# EAGLE board Heart Rate Monitoring System (EAGLE 6.3)
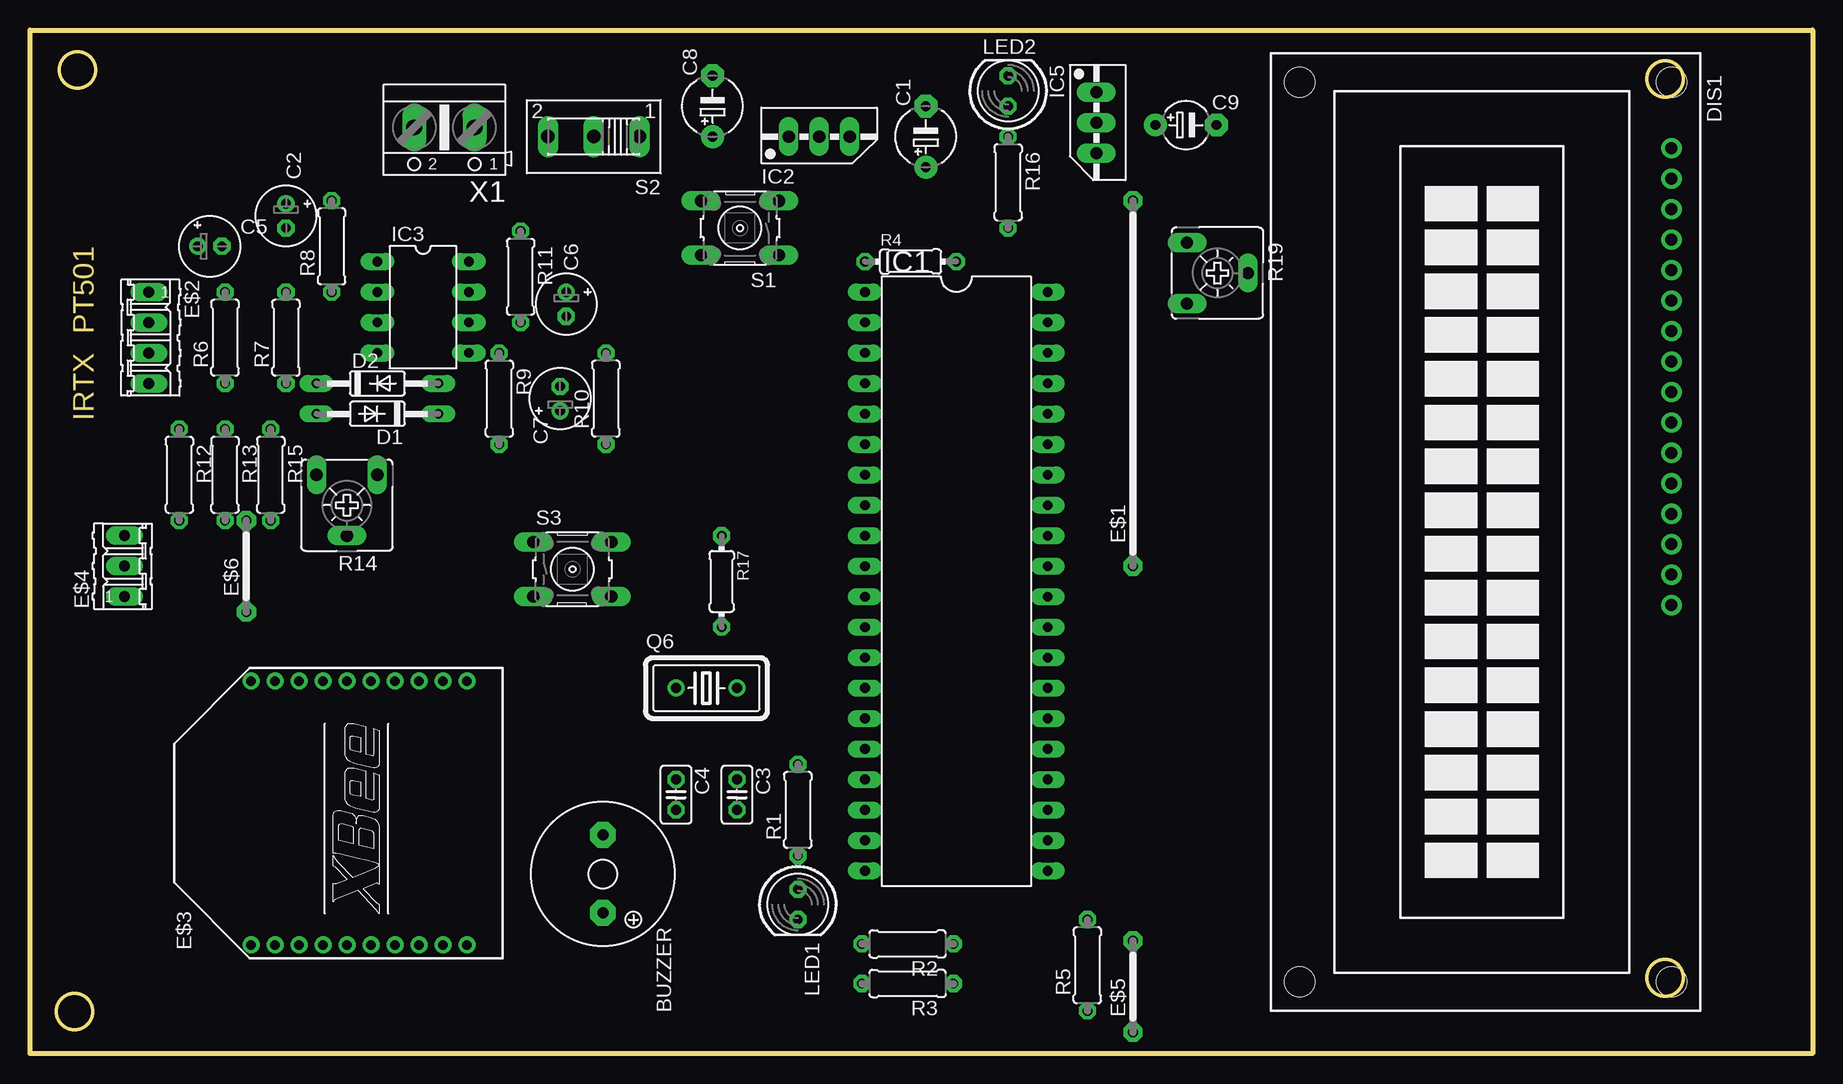
[diagram p0: board, top side]
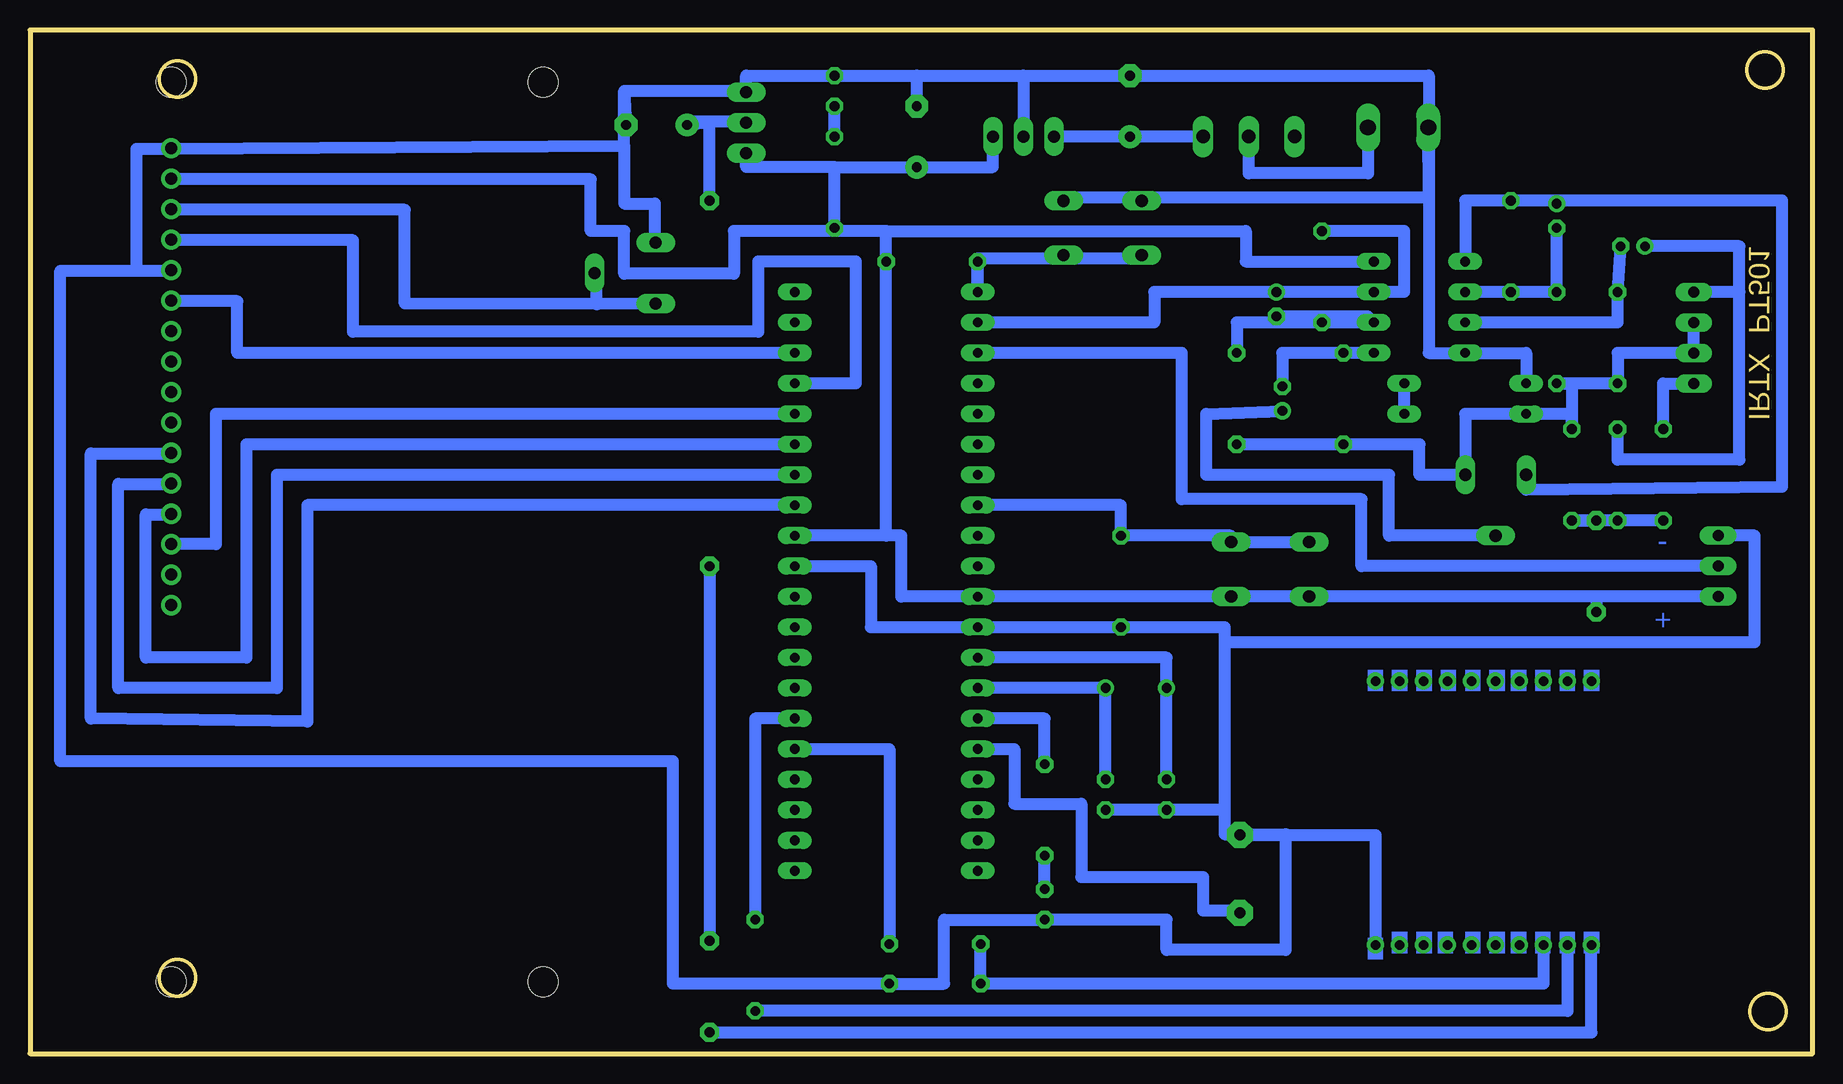
[diagram p1: board, bottom side, seen from below]

Size 148.59 x 85.34 mm. Coordinates in mm from the lower left corner, seen from the top.
Outline: 0,85.34 148.59,85.34 148.59,0 0,0 0,85.34
Outline: circle at 3.97,82.01 radius 1.5
Outline: circle at 3.71,3.52 radius 1.5
Outline: circle at 136.3,6.32 radius 1.5
Outline: circle at 136.3,81.25 radius 1.5
Copper layers (1*16): Top 0.035mm / dielectric 1.5mm / Bottom 0.035mm
Design rules "DFRobot_Eagle_Rule_v0.4": minimum track width 6mil, minimum drill 12mil, track to track 6mil, track to pad 6mil, pad to pad 6mil, via to via 6mil, smd to smd 0mil, copper to edge 10mil, drill to drill 10mil, minimum pad ring 12mil, minimum via ring 8mil, stop-mask expansion 2mil, vias tented up to drill 25mil, thermal gap 10mil

## Footprints (pad centres in the part's own frame; a part is rotated, then mirrored left to right if it is on the bottom)
F/QMBIII = drill 0.914 pad 2.159 octagon: + 3.251,0; - -3.251,0
E5-5 = drill 0.813 pad 1.905: + -2.54,0 | drill 0.813 pad 1.905 octagon: - 2.54,0
E2-5 = drill 0.813 pad 1.27: + -1.016,0 | drill 0.813 pad 1.27 octagon: - 1.016,0
C025-025X050 = drill 0.813 octagon: 1 -1.27,0; 2 1.27,0
E5-4 = drill 0.813 pad 1.905: + -2.54,0 | drill 0.813 pad 1.905 octagon: - 2.54,0
DO35-10 = drill 0.813 long: A 5.08,0; C -5.08,0
TUXGR_16X2_R2 = drill 1 pad 1.676: 1 -32,15.5; 2 -29.46,15.5; 3 -26.92,15.5; 4 -24.38,15.5; 5 -21.84,15.5; 6 -19.3,15.5; 7 -16.76,15.5; 8 -14.22,15.5; 9 -11.68,15.5; 10 -9.14,15.5; 11 -6.6,15.5; 12 -4.06,15.5; 13 -1.52,15.5; 14 1.02,15.5; 15 3.56,15.5; 16 6.1,15.5 | hole 2.5: -37.5,-15.5; 37.5,-15.5; -37.5,15.5; 37.5,15.5
30 = drill 0.813 pad 1.6 octagon: 1 -15.24,0; 2 15.24,0
04P = drill 0.914 long: 1 -3.81,0; 2 -1.27,0; 3 1.27,0; 4 3.81,0
XBEE = drill 0.8 pad 1.27: 1 -11,9; 2 -11,7; 3 -11,5; 4 -11,3; 5 -11,1; 6 -11,-1; 7 -11,-3; 8 -11,-5; 9 -11,-7; 10 -11,-9; 11 11,-9; 12 11,-7; 13 11,-5; 14 11,-3; 15 11,-1; 16 11,1; 17 11,3; 18 11,5; 19 11,7; 20 11,9
03P = drill 0.914 long: 1 -2.54,0; 2 0,0; 3 2.54,0
07 = drill 0.813 pad 1.6 octagon: 1 -3.81,0; 2 3.81,0
DIL40 = drill 0.813 long: 1 -24.13,-7.62; 2 -21.59,-7.62; 3 -19.05,-7.62; 4 -16.51,-7.62; 5 -13.97,-7.62; 6 -11.43,-7.62; 7 -8.89,-7.62; 8 -6.35,-7.62; 9 -3.81,-7.62; 10 -1.27,-7.62; 11 1.27,-7.62; 12 3.81,-7.62; 13 6.35,-7.62; 14 8.89,-7.62; 15 11.43,-7.62; 16 13.97,-7.62; 17 16.51,-7.62; 18 19.05,-7.62; 19 21.59,-7.62; 20 24.13,-7.62; 21 24.13,7.62; 22 21.59,7.62; 23 19.05,7.62; 24 16.51,7.62; 25 13.97,7.62; 26 11.43,7.62; 27 8.89,7.62; 28 6.35,7.62; 29 3.81,7.62; 30 1.27,7.62; 31 -1.27,7.62; 32 -3.81,7.62; 33 -6.35,7.62; 34 -8.89,7.62; 35 -11.43,7.62; 36 -13.97,7.62; 37 -16.51,7.62; 38 -19.05,7.62; 39 -21.59,7.62; 40 -24.13,7.62
78MXXS = drill 1.016 long: GND 0,-2.54; IN -2.54,-2.54; OUT 2.54,-2.54
DIL08 = drill 0.813 long: 1 -3.81,-3.81; 2 -1.27,-3.81; 3 1.27,-3.81; 4 3.81,-3.81; 5 3.81,3.81; 6 1.27,3.81; 7 -1.27,3.81; 8 -3.81,3.81
LED5MM = drill 0.813 octagon: A -1.27,0; K 1.27,0
HC18U-V = drill 0.813: 1 -2.54,0; 2 2.54,0
0207/7 = drill 0.813 octagon: 1 -3.81,0; 2 3.81,0
0204/7 = drill 0.813 octagon: 1 -3.81,0; 2 3.81,0
CA6V = drill 1.016 long: A -2.54,-2.54; E 2.54,-2.54; S 0,2.54
B3F-10XX = drill 1.016 long: 1 -3.251,2.261; 2 3.251,2.261; 3 -3.251,-2.261; 4 3.251,-2.261
255SB = drill 1.118 long: 1 -3.81,0; 2 0,0; 3 3.81,0
AK500/2 = drill 1.321 long: 1 -2.515,0; 2 2.515,0

## Placement (x,y rotation side)
BUZZER  [F/QMBIII]  47.75,14.99 270 top
C1  220uF  [E5-5]  74.68,76.45 90 top
C2  0.47uF  [E2-5]  21.34,69.85 270 top
C3  22p  [C025-025X050]  58.93,21.59 270 top
C4  22p  [C025-025X050]  53.85,21.59 270 top
C5  10uF  [E2-5]  14.99,67.31 0 top
C6  0.47uF  [E2-5]  44.7,62.48 270 top
C7  10uF  [E2-5]  44.2,54.61 90 top
C8  220uF  [E5-5]  56.9,78.99 90 top
C9  220uF  [E5-4]  96.36,77.42 0 top
D1  1N4148  [DO35-10]  28.96,53.34 180 top
D2  1N4148  [DO35-10]  28.96,55.88 0 top
DIS1  TUXGR_16X2_R2  [TUXGR_16X2_R2]  121.33,43.49 270 top
E$1  [30]  91.95,55.88 90 top
E$2  [04P]  9.91,59.69 270 top
E$3  BLUEBEE  [XBEE]  27.43,20.07 90 top
E$4  LM35DZ  [03P]  7.87,40.64 90 top
E$5  [07]  91.95,5.59 90 top
E$6  [07]  18.03,40.64 90 top
IC1  PIC16F877P  [DIL40]  77.22,39.37 270 top
IC2  LM7805  [78MXXS]  65.79,78.99 0 top
IC3  LM358N  [DIL08]  32.77,62.23 270 top
IC5  LM1117  [78MXXS]  91.43,77.61 270 top
LED1  [LED5MM]  64.01,12.45 270 top
LED2  [LED5MM]  81.53,80.26 90 top
Q6  4MHz  [HC18U-V]  56.39,30.48 0 top
R1  1K  [0207/7]  64.01,20.32 90 top
R2  1.8K  [0207/7]  73.15,9.14 180 top
R3  3.3K  [0207/7]  73.15,5.84 180 top
R4  1.5K  [0204/7]  73.41,66.04 0 top
R5  1.8K  [0207/7]  88.14,7.37 90 top
R6  20K  [0207/7]  16.26,59.69 90 top
R7  1K  [0207/7]  21.34,59.69 90 top
R8  100K  [0207/7]  25.15,67.31 90 top
R9  20K  [0207/7]  39.12,54.61 270 top
R10  1K  [0207/7]  48.01,54.61 90 top
R11  100K  [0207/7]  40.89,64.77 270 top
R12  100  [0207/7]  12.45,48.26 270 top
R13  20K  [0207/7]  16.26,48.26 270 top
R14  10K  [CA6V]  26.42,45.72 180 top
R15  5K  [0207/7]  20.07,48.26 270 top
R16  1K  [0207/7]  81.53,72.64 270 top
R17  1.5K  [0204/7]  57.66,39.37 270 top
R19  10K  [CA6V]  98.98,65.08 270 top
S1  [B3F-10XX]  59.18,68.83 180 top
S2  [255SB]  46.99,76.45 180 top
S3  [B3F-10XX]  45.21,40.39 0 top
X1  [AK500/2]  34.54,77.22 180 top

## Library data of the parts
BUZZER = buzzer
C1-C9 R1-R13 R15-R17 = rcl
D1 D2 = diode
DIS1 = display-lcd; OC_FARNELL: unknown; OC_NEWARK: unknown
E$1 E$5 E$6 = jumper
E$2 E$4 = con-amp-quick
E$3 = maxstream
IC1 = microchip
IC2 IC5 = v-reg
IC3 = linear
LED1 LED2 = led
Q6 = crystal
R14 R19 = pot
S1 S3 = switch-omron
S2 = switch
X1 = con-ptr500

## Nets
GND: BUZZER.- C1.- C3.2 C4.2 C8.- C9.- D2.C DIS1.1 DIS1.5 E$3.10 E$4.3 IC1.12 IC1.31 IC2.GND IC3.4 IC5.IN LED1.K LED2.K R3.1 R17.2 R19.A S1.3 S1.4 X1.2
N$1: C2.+ IC3.1 R8.2 R14.E
N$2: C5.- IC3.3 R6.2
N$3: S2.2 X1.1
N$5: IC1.1 R4.1 S1.1 S1.2
N$6: C3.1 IC1.14 Q6.2
N$7: LED1.A R1.1
N$8: IC1.15 R1.2
N$9: BUZZER.+ IC1.16
N$10: C2.- IC3.2 R7.2 R8.1
N$11: C7.+ R14.S
N$12: C7.- IC3.5 R9.1
N$13: C6.+ IC1.2 IC3.7 R11.1
N$14: C6.- IC3.6 R10.2 R11.2
N$15: C5.+ E$2.1 R13.1
N$16: C4.1 IC1.13 Q6.1
N$17: E$2.4 R12.1
N$18: D1.C D2.A
N$19: D1.A E$2.2 E$2.3 R6.1 R7.1 R9.2 R10.1 R14.A R15.1
N$20: E$3.2 R5.1
N$21: IC1.25 R2.1
N$22: E$3.3 R2.2 R3.2
N$23: IC1.26 R5.2
N$26: DIS1.11 IC1.33
N$27: DIS1.12 IC1.34
N$28: DIS1.13 IC1.35
N$29: DIS1.6 IC1.38
N$30: DIS1.3 R19.E R19.S
N$31: DIS1.14 IC1.36
N$32: DIS1.4 IC1.37
S$1: E$4.2 IC1.3
S$2: C9.+ E$1.2 IC5.GND
S$3: IC1.8 R17.1 S3.1 S3.2
S$4: E$6.2 R12.2 R13.2 R15.2
S$5: E$1.1 E$5.2
S$23: LED2.A R16.1
S$24: E$3.1 E$5.1
V+: C8.+ IC2.IN S2.1
VCC: C1.+ DIS1.2 E$4.1 E$6.1 IC1.11 IC1.32 IC2.OUT IC3.8 IC5.OUT R4.2 R16.2 S3.3 S3.4

## Tracks (layer width: path | path; a pad name or v marks a point on that pad's centre or on a via)
GND
  Bottom 1.016: S1.3 61.72,71.37 56.64,71.37 S1.4 55.37,71.37 32,71.37 | D2.C 23.88,58.42 IC3.4 32,58.42 32,71.37 | 32,71.37 X1.2 | 32,71.37 32,81.53 C8.- 65.79,81.53 | 65.79,81.53 IC2.GND | 74.68,81.53 65.79,81.53 | 74.68,81.53 C1.- | R19.A 96.52,67.62 96.52,70.87 99.06,70.87 99.06,75.69 | 74.68,81.53 LED2.K 88.9,81.53 88.9,80.26 | 99.06,77.72 C9.- 99.06,80.26 | 88.9,80.26 IC5.IN | 137.16,75.44 99.06,75.69 | 99.06,75.69 99.06,77.72 | 99.06,77.72 99.06,80.26 | 99.06,80.26 88.9,80.26 | 137.16,75.44 DIS1.1 | DIS1.5 137.16,65.28 139.7,65.28 | 137.16,75.44 139.7,75.44 139.7,65.28 | 139.7,65.28 146.05,65.28 146.05,24.38 95,24.38 95,5.84 R3.1 72.39,5.84 72.39,11.18 LED1.K 53.85,11.18 53.85,8.64 43.94,8.64 43.94,18.29 49.02,18.29 | IC1.31 78.49,40.64 78.49,35.56 IC1.12 R17.2 49.02,35.56 49.02,34.29 | C3.2 C4.2 49.02,20.32 | 49.02,20.32 49.02,18.29 | 49.02,34.29 4.83,34.29 4.83,43.18 E$4.3 | 49.02,34.29 49.02,34.04 49.02,20.32 | E$3.10 36.43,18.24 BUZZER.- 49.02,18.29
N$1
  Bottom 1.016: 21.34,71.12 R8.2 28.96,71.12 IC3.1 | R14.E 23.88,46.99 2.54,47.24 2.54,71.12 21.34,71.12 | 21.34,71.12 C2.+
N$2
  Bottom 1.016: C5.- R6.2 16.26,60.96 IC3.3
N$3
  Bottom 1.016: X1.1 37.06,73.41 46.99,73.41 S2.2
N$5
  Bottom 1.016: R4.1 IC1.1 69.6,66.29 55.37,66.29 S1.2 56.64,66.29 61.72,66.29 S1.1
N$6
  Bottom 1.016: C3.1 Q6.2 IC1.14
N$7
  Bottom 1.016: LED1.A R1.1
N$8
  Bottom 1.016: R1.2 64.01,27.94 IC1.15
N$9
  Bottom 1.016: IC1.16 66.55,25.4 66.55,20.83 60.96,20.83 60.96,14.73 50.8,14.73 50.8,11.94 47.75,11.94 BUZZER.+
N$10
  Bottom 1.016: C2.- R7.2 R8.1 IC3.2
N$11
  Bottom 1.016: R14.S 35.31,43.18 35.31,48.26 50.55,48.26 50.55,53.34 C7.+
N$12
  Bottom 1.016: IC3.5 R9.1 44.2,58.42 C7.-
N$13
  Bottom 1.016: R11.1 34.04,68.58 34.04,63.5 IC3.7 C6.+ 54.86,63.5 54.86,60.96 IC1.2
N$14
  Bottom 1.016: R11.2 IC3.6 37.08,61.47 40.89,61.47 | R11.2 48.01,60.96 R10.2 | 40.89,61.47 C6.- | R11.2 40.89,61.47
N$15
  Bottom 1.016: C5.+ 6.1,67.31 6.1,63.5 | R13.1 16.26,49.53 6.1,49.53 6.1,63.5 | 6.1,63.5 E$2.1
N$16
  Bottom 1.016: C4.1 Q6.1 53.85,33.02 IC1.13
N$17
  Bottom 1.016: R12.1 12.45,55.88 E$2.4
N$18
  Bottom 1.016: D1.C D2.A
N$19
  Bottom 1.016: R10.1 R9.2 32.77,50.8 32.77,48.26 R14.A 28.96,53.34 D1.A 20.07,53.34 R15.1 20.07,55.88 R7.1 R6.1 16.26,58.42 E$2.3 E$2.2
N$20
  Bottom 1.016: E$3.2 20.43,3.56 R5.1
N$21
  Bottom 1.016: IC1.25 76.96,25.4 R2.1
N$22
  Bottom 1.016: E$3.3 22.43,5.84 R3.2 R2.2
N$23
  Bottom 1.016: IC1.26 88.14,27.94 R5.2
N$26
  Bottom 1.016: IC1.33 125.48,45.72 125.48,27.69 143.51,27.94 143.51,50.04 137.16,50.04 DIS1.11
N$27
  Bottom 1.016: IC1.34 128.02,48.26 128.02,30.48 141.22,30.48 141.22,47.5 137.16,47.5 DIS1.12
N$28
  Bottom 1.016: IC1.35 130.56,50.8 130.56,33.02 138.94,33.02 138.94,44.96 136.83,44.96 DIS1.13
N$29
  Bottom 1.016: IC1.38 131.32,58.42 131.32,62.74 136.4,62.74 DIS1.6
N$30
  Bottom 1.016: 101.35,62.48 101.35,64.77 | R19.E 101.35,62.48 | 101.35,64.77 R19.S 101.6,65.08 101.35,64.77 | DIS1.3 136.65,70.36 117.35,70.36 117.35,62.54 101.35,62.48
N$31
  Bottom 1.016: DIS1.14 133.1,42.47 133.1,53.34 IC1.36
N$32
  Bottom 1.016: IC1.37 79.76,55.88 79.76,66.04 87.88,66.04 87.88,60.2 121.67,60.2 121.67,67.82 136.91,67.82 DIS1.4
S$1
  Bottom 1.016: IC1.3 52.58,58.42 52.58,46.23 37.59,46.23 37.59,40.64 E$4.2
S$2
  Bottom 1.016: IC5.GND 89.92,77.72 93.73,77.72 C9.+ 91.95,77.68 E$1.2
S$3
  Bottom 1.016: IC1.8 57.66,45.72 R17.1 48.51,43.18 S3.2 48.01,42.67 42.93,42.67 S3.1
S$4
  Bottom 1.016: R12.2 R13.2 R15.2 E$6.2
S$5
  Bottom 1.016: E$1.1 E$5.2
S$23
  Bottom 1.016: R16.1 LED2.A
S$24
  Bottom 1.016: E$5.1 18.43,1.78 E$3.1
V+
  Bottom 1.016: S2.1 C8.+ IC2.IN
VCC
  Bottom 1.016: IC3.8 47.24,66.04 47.24,68.58 77.22,68.58 | IC2.OUT 68.33,73.91 C1.+ 81.53,73.91 | IC5.OUT 88.9,74.93 88.9,73.91 81.53,73.91 | DIS1.2 136.65,72.9 101.85,72.9 101.85,68.58 99.06,68.58 99.06,65.02 89.92,65.02 89.92,68.58 81.53,68.58 | 81.53,73.91 R16.2 81.53,68.58 | 77.22,68.58 81.53,68.58 | 77.22,68.58 R4.2 77.22,43.18 | 77.22,43.18 IC1.32 | 77.22,43.18 75.95,43.18 75.95,38.1 IC1.11 49.28,38.1 | E$4.1 18.03,38.1 | 18.03,38.1 42.93,38.1 | 42.93,38.1 49.28,38.1 | 42.93,38.1 S3.3 | 49.28,38.1 S3.4 | 18.03,38.1 E$6.1
(copper drawn outside any net)
  shapes: Bottom area x20

## Text on the board
Bottom: - | +
Dimension: PT501 | IRTX